# EAGLE board Class_4 (EAGLE 5.09)

No outline drawn. Coordinates in mm, seen from the top.
Copper layers (1*16): Top 0.035mm / dielectric 1.5mm / Bottom 0.035mm
Design rules "default": minimum track width 10mil, minimum drill 24mil, track to track 8mil, track to pad 8mil, pad to pad 8mil, via to via 8mil, smd to smd 8mil, copper to edge 40mil, drill to drill 8mil, minimum pad ring 10mil, minimum via ring 8mil, stop-mask expansion 4mil, vias tented up to drill 0mil, thermal gap 10mil

## Footprints (pad centres in the part's own frame; a part is rotated, then mirrored left to right if it is on the bottom)
L_PICC_CLASS4_50PF_01 = drill 0.7 round: P$1 25.5,1; P$2 25.5,-1; P$3 21,1 | hole 2: 0,0

## Placement (x,y rotation side)
E$1  [L_PICC_CLASS4_50PF_01]  0,0 0 top

## Library data of the parts
E$1 = NXP_PICC_Antennas